# Altium PCB PCB.PcbDoc
Units mm, origin at the board's own origin, x right, y up, seen from the top; angles counter-clockwise.
Board outline 40.26 x 58.32 mm, 2 copper layers (Top Layer, Bottom Layer); 28 components, 24 nets, 130 pads, 39 vias.
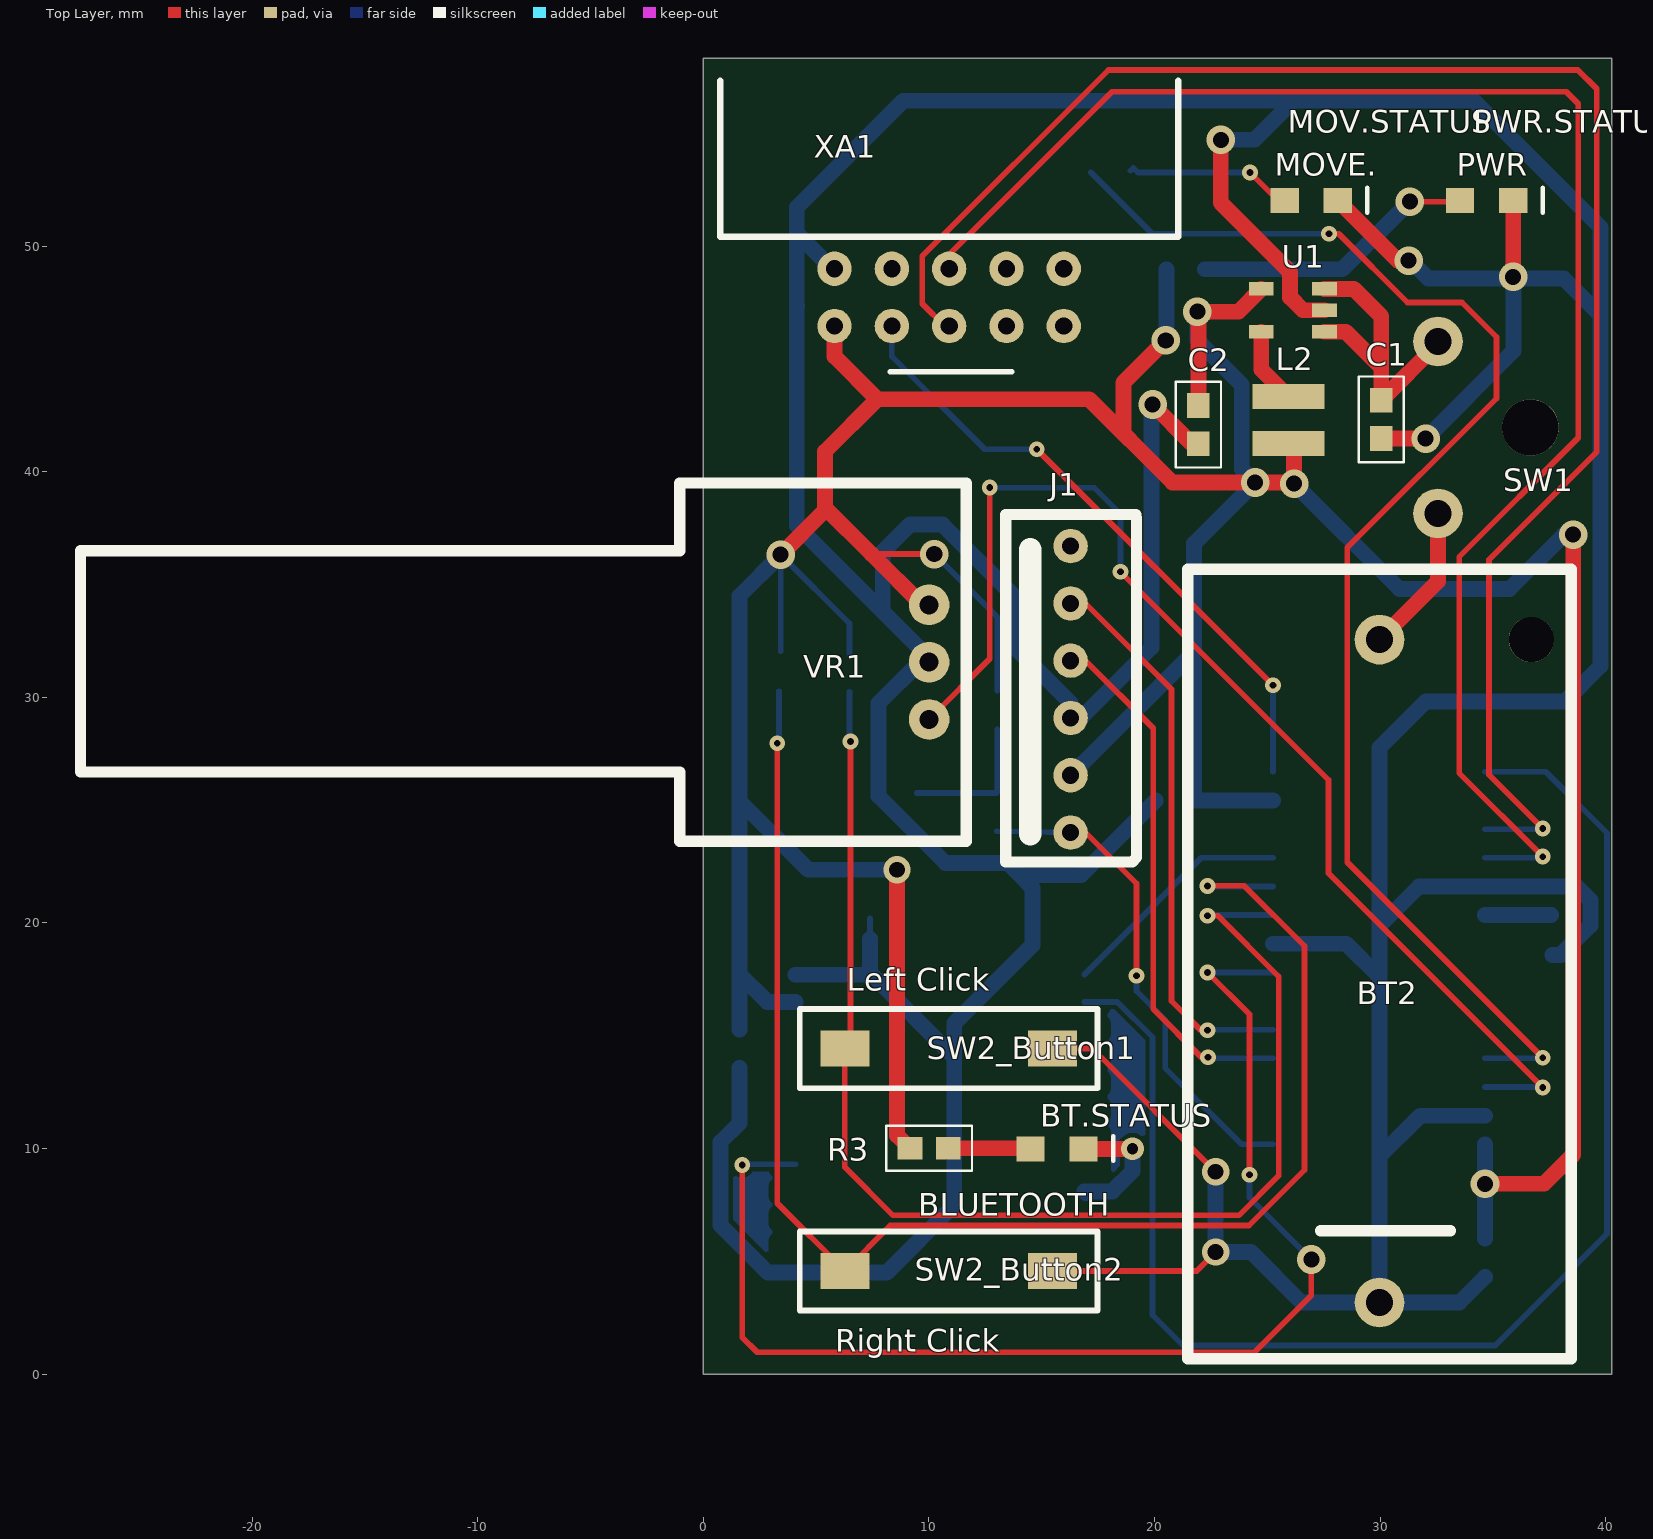
[diagram p0: Top Layer view]
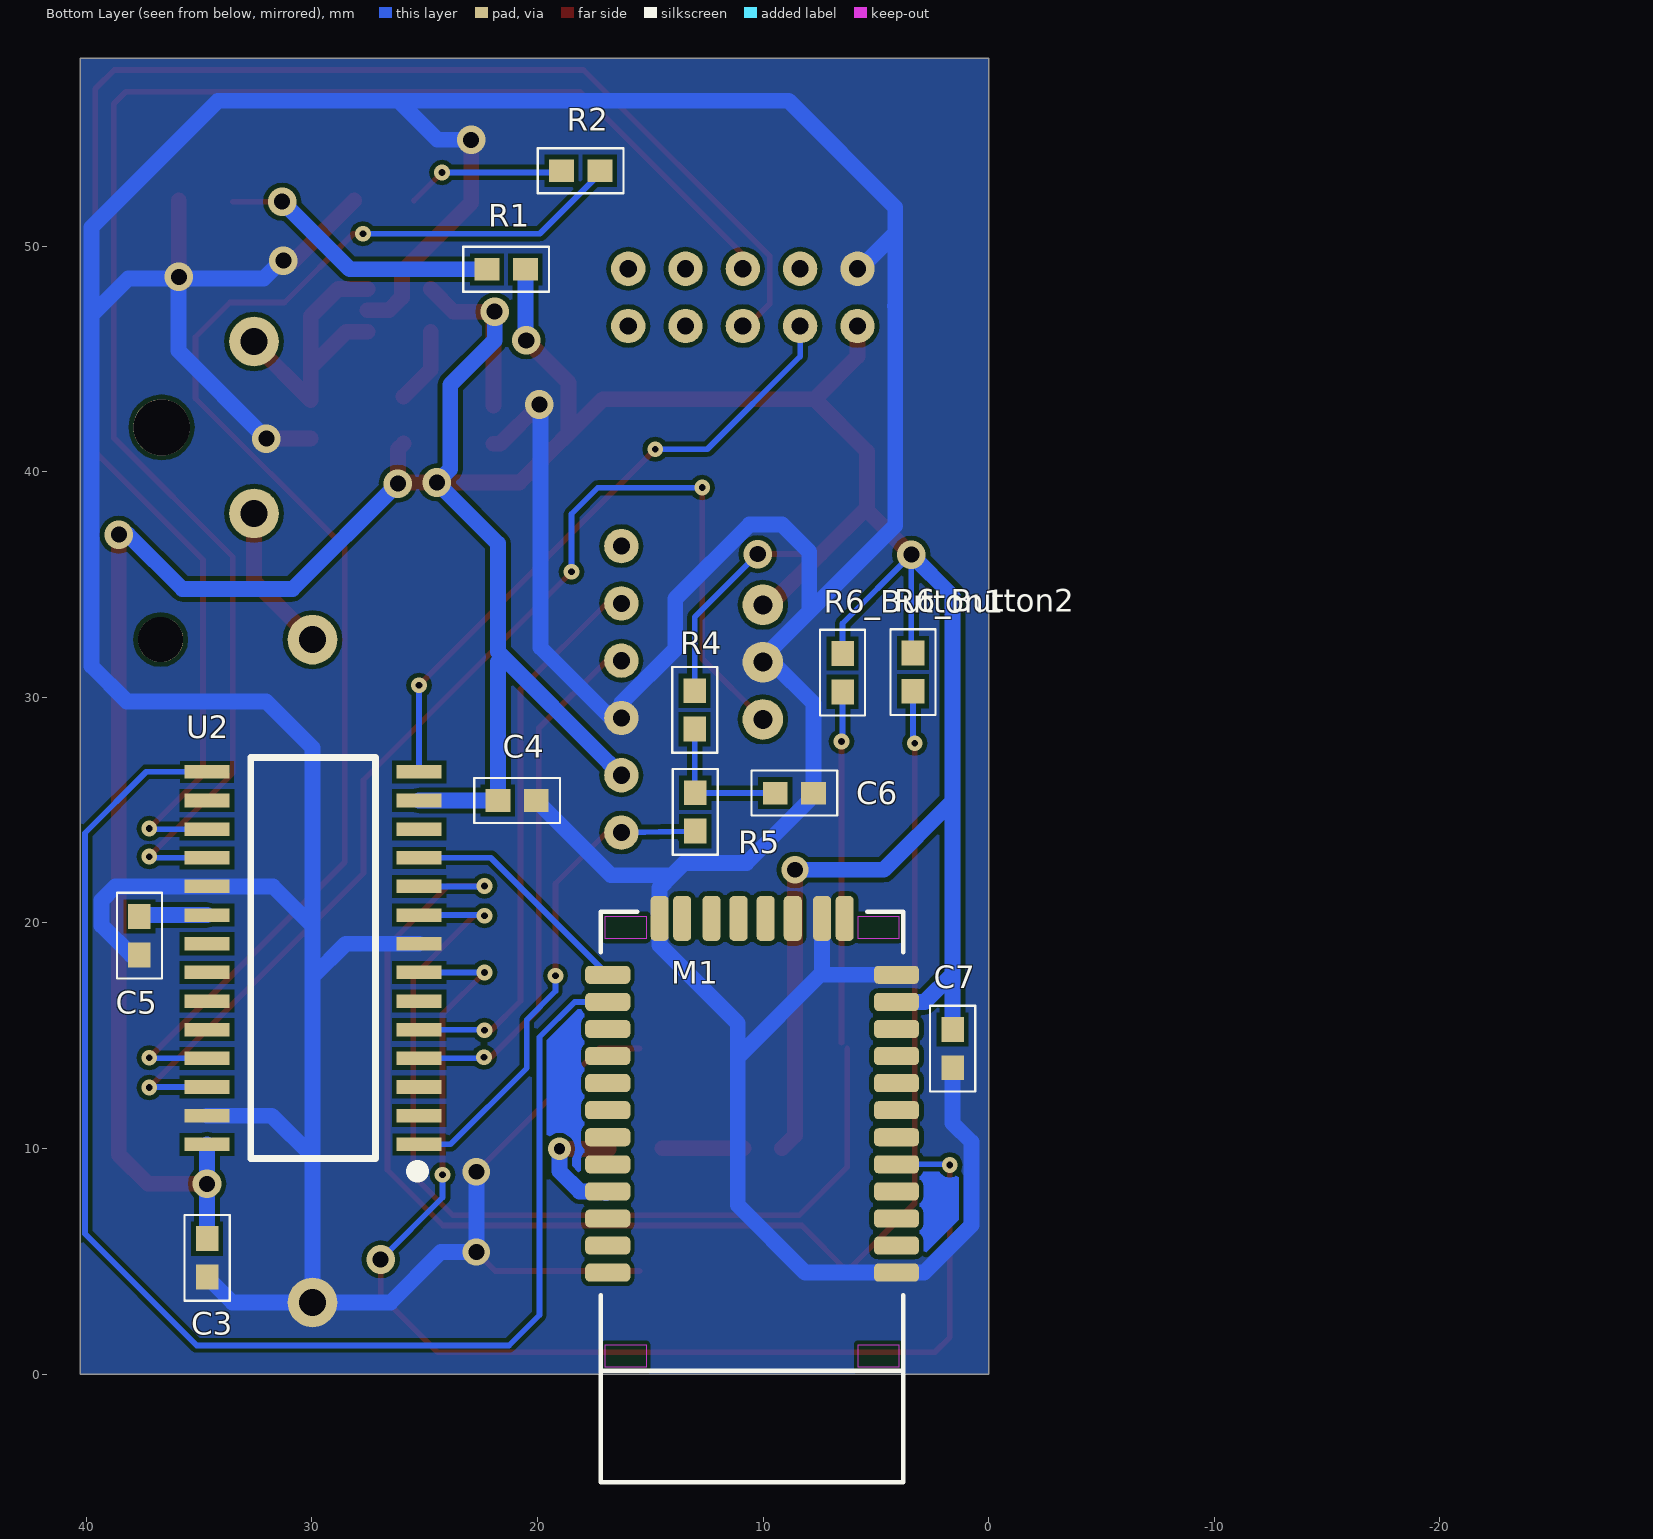
[diagram p1: Bottom Layer view, seen from below]

## Layer stack, top to bottom
Top Solder: solder mask 0.0102, Solder Resist, Dk 3.5
Top Layer: signal copper 0.0356
Dielectric 1: dielectric 0.32, FR-4, Dk 4.8
Bottom Layer: signal copper 0.0356
Bottom Solder: solder mask 0.0102, Solder Resist, Dk 3.5

## Board outline
0,0 40.259,0 40.259,58.318 0,58.318

## Design rules (kind name [scope] priority, off if disabled: settings)
Clearance [All] p1: gap=0.2
HoleSize [All] p1: absolutevalues=TRUE maxlimit=2.54 minlimit=0.3 maxpercent=80.000 minpercent=20.000
PolygonConnect [All] p1: connectstyle=Direct reliefconductorwidth=0.254 reliefentries=4 polygonreliefangle="90 Angle" airgapwidth=0.254
RoutingVias [All] p1: holewidth=0.711 width=1.27 viastyle="Through Hole" minholewidth=0.3 minwidth=0.7 maxholewidth=0.711 maxwidth=1.27
SilkToBoardRegionClearance [All] p1 off:
SolderMaskExpansion [All] p1: expansion=0.102
UnpouredPolygon [All] p1: allowunpoured=FALSE
Width [All] p1: maxlimit=1 minlimit=0.2 preferedwidth=0.254
27 further rules are at their usual default settings.

## Classes and differential pairs
channel class Button: Button1 Button2
component class PIC32MX: C3 C4 C5 C6 J1 MOV.STATUS R2 R4 R5 U2 VR1
component class Button2: R6_Button2 SW2_Button2
component class Button1: R6_Button1 SW2_Button1
component class Bluetooth: BT.STATUS C7 R3
component class Alim: C1 C2 L2 PWR.STATUS R1 SW1 U1
component class 9-axe: XA1

## Components (designator, comment, footprint, x,y, rotation, side; value= is the part's Value field where it differs from the comment)
BT2 "Battery" "Battery Holder" 29.973,3.175 r90 top
BT.STATUS "2mA, 1.8V" LED 15.672,9.982 r0 top (schematic designator D3)
C1 "4.7 uF" "CAP 0603" 30.048,42.316 r90 top
C2 "10 uF" "CAP 0603" 21.946,42.088 r90 top
C3 "0.1uF" "CAP 0603" 34.646,5.156 r90 bottom
C4 "0.1uF" "CAP 0603" 20.904,25.425 r0 bottom
C5 "10uF" "CAP 0603" 37.643,19.431 r90 bottom
C6 "0.1uF" "CAP 0603" 8.611,25.756 r0 bottom
C7 "Cap" "CAP 0603" 1.6,14.427 r90 bottom
J1 "Program / Debug" ICSP 16.281,24.003 r90 top
L2 "4.7uH" Coil 25.933,42.291 r270 top
M1 "RN42" RN42 3.785,20.498 r0 bottom
MOV.STATUS "2mA, 1.8V" LED 26.949,52.019 r0 top (schematic designator D2)
PWR.STATUS "2mA, 1.8V" LED 34.722,52.019 r0 top (schematic designator D1)
R1 "750" "RES 0603" 21.387,48.971 r180 bottom
R2 "750" "RES 0603" 18.085,53.34 r180 bottom
R3 "750" "RES 0603" 10.008,10.008 r180 top
R4 "10K" "RES 0603" 13.03,29.439 r90 bottom
R5 "1K" "RES 0603" 13.005,24.917 r90 bottom
R6_Button1 "10k" "RES 0603" 6.477,31.09 r90 bottom (schematic designator R6)
R6_Button2 "10k" "RES 0603" 3.353,31.115 r90 bottom (schematic designator R6)
SW1 "SW" "SWITCH ON/OFF" 32.563,38.151 r90 top
SW2_Button1 "SW-SPST" SWITCH 6.274,14.427 r0 top (schematic designator SW2)
SW2_Button2 "SW-SPST" SWITCH 6.274,4.572 r0 top (schematic designator SW2)
U1 "MCP1503B" MCP1603B/TSOT 27.534,46.203 r180 top
U2 "PIC32MX150F128B" PIC32MX150F128B 25.248,10.185 r0 bottom
VR1 "5k" 91A1A-B28-B13L 11.659,39.497 r180 top
XA1 "MOD-MPU9150 Breakout Board" MOD-MPU9150 11.278,51.841 r90 top

## Footprints (in the part's own frame and the unit in brackets; to place one, negate y for a bottom-side part, rotate by r counter-clockwise, add the part's x,y. Pads: shape width x height; smd on the part's side, far side on the other; paste and mask are expansions set on the pad)
91A1A-B28-B13L [mm] "Potard"
  round 1.8 hole 0.85: 1(1.65,5.4) 2(1.65,7.94) 3(1.65,10.48)
  silkscreen extent 0,0 39.27,15.88
"Battery Holder" [mm]
  round 2 hole 2 unplated: 0(29.38,-6.73)
  round 2.2 hole 1.2: 1(29.38,0) 2(0,0)
  silkscreen extent -2.5,-8.5 32.5,8.5
"CAP 0603" [mm]
  rect 1.1x1 smd: 1(-0.85,0) 2(0.85,0)
  silkscreen extent -1.9,-1 1.9,1
Coil [mm]
  rect 1.12x3.2 smd: 1(-1.04,0) 2(1.04,0)
ICSP [mil] "ICSP - 6 PINS"
  round 60 hole 30: 1(0.01,-0.02) 2(100.01,-0.02) 3(200.01,-0.02) 4(300.01,-0.02) 5(400.01,-0.02) 6(500.01,-0.02)
  silkscreen extent -51,-115 555,113
LED [mm]
  rect 1.25x1.1 smd: 1(-1.175,0) 2(1.175,0)
  silkscreen extent 2.49,-0.53 2.49,0.56
MCP1603B/TSOT [mm] "TSOT Package for MCP1603 and MCP1603B buck regulator"
  rect 1.1x0.6 smd: 1(0,0) 2(0,-0.95) 3(0,-1.9) 4(2.8,-1.9) 5(2.8,0)
MOD-MPU9150 [mil] "Header for the UEXT + 1"
  round 60 hole 30: 1(-212,215) 2(-112,215) 4(-112,115) 5(-212,15) 6(-112,15) 7(-212,-85) 8(-112,-85) 9(-212,-185) 10(-112,-185) 14(-212,115)
  silkscreen extent -292,-385 216,415
PIC32MX150F128B [mm] "SOIC Package"
  rect 2x0.6 smd: 1(0,0) 2(0,-1.27) 3(0,-2.54) 4(0,-3.81) 5(0,-5.08) 6(0,-6.35) 7(0,-7.62) 8(0,-8.89) 9(0,-10.16) 10(0,-11.43) 11(0,-12.7) 12(0,-13.97) 13(0,-15.24) 14(0,-16.51) 15(9.4,-16.51) 16(9.4,-15.24) 17(9.4,-13.97) 18(9.4,-12.7) 19(9.4,-11.43) 20(9.4,-10.16) 21(9.4,-8.89) 22(9.4,-7.62) 23(9.4,-6.35) 24(9.4,-5.08) 25(9.4,-3.81) 26(9.4,-2.54) 27(9.4,-1.27) 28(9.4,0)
  silkscreen extent 0.05,-17.14 7.46,1.19
"RES 0603" [mm]
  rect 1.1x1 smd: 1(-0.85,0) 2(0.85,0)
  silkscreen extent -1.9,-1 1.9,1
RN42 [mm] "RN42 Bluetooth Module with antenna"
  rrect50% 2x0.8 smd: 1(0.3,16) 2(0.3,14.8) 3(0.3,13.6) 4(0.3,12.4) 5(0.3,11.2) 6(0.3,10) 7(0.3,8.8) 8(0.3,7.6) 9(0.3,6.4) 10(0.3,5.2) 11(0.3,4) 12(0.3,2.8) 13(13.1,2.8) 14(13.1,4) 15(13.1,5.2) 16(13.1,6.4) 17(13.1,7.6) 18(13.1,8.8) 19(13.1,10) 20(13.1,11.2) 21(13.1,12.4) 22(13.1,13.6) 23(13.1,14.8) 24(13.1,16)
  rrect50% 0.8x2 smd mask+0.05: 28(10.8,0.3) 29(3.6,0.3) 30(9.8,0.3) 35(2.6,0.3)
  rrect50% 0.8x2 smd: 31(8.5,0.3) 32(7.3,0.3) 33(6.1,0.3) 34(4.9,0.3)
  Top Layer keep-out region: 0.2,1.2 2,1.2 2,0.2 0.2,0.2
  Top Layer keep-out region: 11.4,20.2 13.2,20.2 13.2,19.2 11.4,19.2
  Top Layer keep-out region: 0.2,20.2 2,20.2 2,19.2 0.2,19.2
  Top Layer keep-out region: 11.4,1.2 13.2,1.2 13.2,0.2 11.4,0.2
  silkscreen extent 0,0 13.4,25.3
SWITCH [mm]
  rect 2.18x1.6 smd: 1(0,0) 2(9.2,0)
  silkscreen extent -2,-1.75 11.2,1.75
"SWITCH ON/OFF" [mm]
  round 2.5 hole 2.5 unplated: 0(3.81,-4.1)
  round 2.2 hole 1.2: 1(0,0) 2(7.62,0)

## Part data
BT2: "Multicell Battery"
BT.STATUS MOV.STATUS PWR.STATUS: library part LED0, "Typical INFRARED GaAs LED"
C1 C2 C3 C4 C5 C6: library part Cap, "Capacitor"
C7: "Capacitor"
J1: library part MHDR1X6, "Header, 6-Pin"
L2: library part Inductor, "Inductor"
M1: "RN42 Bluetooth Module by Roven Networks"
R1 R2 R3 R4 R5 R6_Button1 R6_Button2: library part Res1, "Resistor"
SW1: library part SW-SPST, "Single-Pole, Single-Throw Switch"
SW2_Button1 SW2_Button2: "Single-Pole, Single-Throw Switch"
U1: library part MCP1603B, "Fixed 3.3Vout 0.5Aout regulator"
U2: library part PIC32MX130F256B, "PIC32MX Family Microcontroller"
VR1: library part RPot, "Potentiometer"
XA1: library part MPU9150, "MPU9150 Breakout Board, displaying 3 headers"

## Via types
v1: diameter 0.7, hole 0.3, Top Layer to Bottom Layer, 20 vias
v2: diameter 1.27, hole 0.711, Top Layer to Bottom Layer, 15 vias
v3: diameter 1.21, hole 0.7, Top Layer to Bottom Layer, 3 vias
v4: diameter 1, hole 0.5, Top Layer to Bottom Layer, 1 vias

## Nets (pads, with @x,y where several pads share a name; then routed paths per layer and width w, separated by ;. In a path a pad name is that pad's centre, name@x,y a point inside that pad or via, vN(x,y) a via of type N, cw(c..) or ccw(c..) an arc to the next point about the centre after c; other vN are vias at no path point)
"BOUTTON 1": R6_Button1.1 SW2_Button1.1 U2.9 | length 57.7
  Top Layer w0.254: SW2_Button1.1 6.274,9.169 8.407,7.036 23.749,7.036 25.502,8.788 25.502,17.628 22.809,20.32 v1(22.347,20.32) ; v1@6.426,28.042 v1(6.528,28.042) SW2_Button1.1@6.528,14.681
  Bottom Layer w0.254: v1@6.477,28.092 R6_Button1.1 ; v1@22.373,20.345 U2.9
"BOUTTON 2": R6_Button2.1 SW2_Button2.1 U2.10 | length 67.3
  Top Layer w0.254: v1(3.277,27.965) 3.277,7.569 SW2_Button2.1 8.284,6.582 24.184,6.582 26.645,9.042 26.645,18.974 23.978,21.641 v1(22.347,21.641)
  Bottom Layer w0.254: v1@3.353,28.042 R6_Button2.1 ; v1@22.373,21.615 U2.10
GND: BT2.2 C1.1 C2.1 C3.1 C4.1 C5.1 C6.1 C7.1 J1.3 M1.1 M1.12 M1.28 M1.29 MOV.STATUS.2 PWR.STATUS.2 SW2_Button1.2 SW2_Button2.2 U1.2 U2.8 U2.19 U2.27 VR1.2 XA1.2 | length 324.7
  Top Layer w0.254: SW2_Button2.2 21.869,4.572 v3(22.708,5.41) ; SW2_Button1.2 17.247,14.427 v3(22.708,8.966)
  Top Layer w0.7: v2(19.914,42.977) 21.653,41.238 C2.1 ; v2(22.936,54.712) 22.936,51.918 26.01,48.844 26.01,47.727 26.584,47.153 U1.2 ; MOV.STATUS.2 30.791,49.352 v2(31.267,49.352) ; C1.1 v2(32.018,41.466) ; v2(35.897,48.634) PWR.STATUS.2
  Bottom Layer w0.254: M1.29@7.385,19.285 M1.29 ; C6.1@7.761,25.628 C6.1
  Bottom Layer w0.7: C7.1 1.6,11.125 0.762,10.287 0.762,6.604 2.868,4.498 M1.1 8.13,4.498 11.125,7.493 11.125,14.046 ; M1.12 7.296,17.698 ; 4.166,47.346 4.14,47.346 ; XA1.2 5.715,48.997 4.14,50.571 ; M1.29@7.385,19.285 7.385,17.787 11.125,14.046 ; C6.1@7.761,25.628 10.732,22.657 13.487,22.657 14.036,22.108 ; C6.1 7.761,29.732 9.586,31.557 VR1.2 ; 7.95,33.884 7.95,36.449 9.155,37.654 10.605,37.654 13.894,34.366 13.894,32.132 16.282,29.744 J1.3 16.739,29.083 19.863,32.207 19.863,43.028 v2(19.914,42.977) ; VR1.2@10.105,31.653 4.14,37.617 4.14,47.346 ; C4.1 16.737,22.108 14.036,22.108 ; v3(22.708,8.966) v3(22.708,5.41) 24.282,5.41 26.518,3.175 BT2.2 ; v2(22.936,54.712) 24.435,54.712 26.162,56.439 ; U2.8 28.5,19.075 29.973,17.602 ; v2@31.293,49.403 32.131,48.565 v2@35.897,48.565 ; v2(32.018,41.466) 35.916,45.364 v2@35.916,48.565 ; C3.1 33.514,3.175 BT2.2 ; U2.27 31.777,11.455 29.973,9.652 ; v2(35.897,48.634) v2@35.941,48.59 ; v2@35.941,48.565 38.142,48.565 39.768,46.939 ; C5.1 38.012,18.581 39.319,19.888 39.319,21.006 38.71,21.615 U2.19 31.726,21.615 29.973,19.863 ; 4.14,47.346 4.14,50.571 ; 4.14,50.571 4.14,51.714 8.865,56.439 26.162,56.439 ; 11.125,14.046 11.125,15.545 14.585,19.004 M1.28 14.585,21.56 14.036,22.108 ; 26.162,56.439 34.163,56.439 39.768,50.834 39.768,46.939 ; BT2.2 29.973,9.652 ; 29.973,9.652 29.973,17.602 ; 29.973,17.602 29.973,19.863 ; 29.973,19.863 29.973,27.764 32.029,29.82 38.202,29.82 39.768,31.386 39.768,46.939
MCLR: J1.1 R5.1 U2.1 | length 22
  Top Layer w0.254: J1.1 16.942,24.003 19.202,21.743 v1(19.202,17.653)
  Bottom Layer w0.254: R5.1 J1.1 ; v1(19.202,17.653) 19.202,16.974 20.469,15.707 20.469,13.567 23.851,10.185 U2.1
NetBT2_1: BT2.1 SW1.1 | length 6.7
  Top Layer w0.7: BT2.1 32.563,35.144 SW1.1
NetC1_2: C1.2 SW1.2 U1.1 U1.3 | length 13.5
  Top Layer w0.7: U1.1 28.473,46.203 30.048,44.628 ; U1.3 28.834,48.103 30.048,46.888 30.048,44.628 ; SW1.2@32.563,45.681 C1.2 30.048,44.628
NetC5_2: C5.2 U2.20 | length 2.9
  Bottom Layer w0.7: U2.20 C5.2@37.578,20.345
NetC6_2: C6.2 R4.1 R5.2 | length 6.3
  Bottom Layer w0.254: C6.2 R5.2@12.993,25.756 ; R5.2@13.03,25.793 R4.1
NetD1_1: PWR.STATUS.1 R1.1 | length 12.5
  Top Layer w0.254: v2(31.318,51.968) PWR.STATUS.1@33.496,51.968
  Bottom Layer w0.7: R1.1 28.321,48.971 v2(31.318,51.968)
NetD2_1: MOV.STATUS.1 R2.1 | length 7.2
  Top Layer w0.254: v1(24.232,53.264) MOV.STATUS.1@25.476,52.019
  Bottom Layer w0.254: R2.1 19.062,53.467 19.265,53.264 v1(24.232,53.264)
NetD3_1: BT.STATUS.1 R3.1 | length 3.6
  Top Layer w0.7: R3.1 BT.STATUS.1@14.471,10.008
NetD3_2: BT.STATUS.2 M1.21 | length 5.8
  Top Layer w0.7: BT.STATUS.2 v4@19.021,9.982
  Bottom Layer w0.7: M1.21@16.956,8.026 M1.21 18.131,8.098 19.025,8.992 v4(19.025,9.986)
NetL2_1: L2.1 U1.5 | length 3.4
  Top Layer w0.7: U1.5 24.734,44.531 25.907,43.358 L2.1
NetM1_5: M1.5 U2.7 | length 55.6
  Top Layer w0.254: v1(1.727,9.271) 1.727,1.626 2.388,0.965 24.435,0.965 26.949,3.48 v2(26.949,5.08) ; v1(22.347,17.805) 24.206,15.946 v1(24.206,8.839)
  Bottom Layer w0.254: v1@1.754,9.298 M1.5 ; v1(22.347,17.805) U2.7 ; v1(24.206,8.839) 24.206,7.823 v2(26.949,5.08)
NetM1_13: M1.13 U2.11 | length 10.5
  Bottom Layer w0.254: M1.13 22.072,22.885 U2.11
NetM1_14: M1.14 U2.15 | length 63
  Bottom Layer w0.254: M1.14 18.351,16.498 19.914,14.935 19.914,2.616 21.26,1.27 35.103,1.27 40.056,6.223 40.056,23.978 37.338,26.695 U2.15
NetR2_2: R2.2 U2.25 | length 61.8
  Top Layer w0.254: v1(27.737,50.546) 28.169,50.546 31.217,47.498 33.63,47.498 35.154,45.974 35.154,43.242 28.546,36.635 28.546,22.685 v1(37.211,14.021)
  Bottom Layer w0.254: R2.2@17.17,53.276 19.9,50.546 v1(27.737,50.546) ; U2.25 v1@37.186,13.995
NetU2_14: U2.14 XA1.14 | length 28.1
  Top Layer w0.254: v1(14.783,40.996) v1(25.248,30.531)
  Bottom Layer w0.254: XA1.14 8.357,45.11 12.471,40.996 v1(14.783,40.996) ; U2.14 v1(25.248,30.531)
NetU2_17: U2.17 XA1.5 | length 75.7
  Top Layer w0.254: XA1.5 10.693,46.457 9.703,47.447 9.703,49.555 17.958,57.81 38.76,57.81 39.599,56.972 39.599,40.869 34.823,36.093 34.823,26.568 v1(37.211,24.181)
  Bottom Layer w0.254: U2.17 v1@37.186,24.155
NetU2_18: U2.18 XA1.6 | length 71.3
  Top Layer w0.254: XA1.6 10.897,49.632 18.11,56.845 38.252,56.845 38.786,56.312 38.786,41.504 33.503,36.22 33.503,26.645 v1(37.211,22.936)
  Bottom Layer w0.254: U2.18 v1@37.16,22.885
NetU2_26: U2.26 VR1.3 | length 53.4
  Top Layer w0.254: VR1.3 12.7,31.708 v1(12.7,39.294) ; v1(18.491,35.56) 27.711,26.34 27.711,22.2 v1(37.211,12.7)
  Bottom Layer w0.254: v1(12.7,39.294) 17.323,39.294 18.491,38.125 v1(18.491,35.56) ; U2.26 v1@37.186,12.725
PGEC: J1.5 U2.5 | length 24.9
  Top Layer w0.254: J1.5 16.942,34.163 20.752,30.354 20.752,16.535 22.047,15.24 v1(22.347,15.24)
  Bottom Layer w0.254: v1@22.373,15.265 U2.5
PGED: J1.4 U2.4 | length 23.5
  Top Layer w0.254: J1.4 16.942,31.623 19.939,28.626 19.939,16.18 22.073,14.046 v1(22.373,14.046)
  Bottom Layer w0.254: v1@22.423,13.995 U2.4
V3P3: C2.2 C3.2 C4.2 C7.2 J1.2 L2.2 M1.11 R1.2 R3.2 R4.2 R6_Button1.2 R6_Button2.2 U1.4 U2.13 U2.28 VR1.1 XA1.1 | length 206.8
  Top Layer w0.254: 7.453,36.347 v2(10.236,36.347)
  Top Layer w0.7: v2(3.429,36.322) 5.393,38.286 ; XA1.1 5.817,45.11 7.713,43.214 ; v3(8.585,22.352) 8.585,10.58 R3.2 ; VR1.1@9.704,34.097 7.453,36.347 5.393,38.408 5.393,40.894 7.713,43.214 ; 18.618,41.7 18.618,43.942 v2(20.498,45.822) ; C2.2 21.946,47.041 v2(21.895,47.092) 23.723,47.092 U1.4 ; L2.2 26.187,40.997 v2(26.187,39.472) ; v2@26.137,39.522 v2(24.46,39.522) 20.796,39.522 17.104,43.214 7.713,43.214 ; v2(34.646,8.433) 37.262,8.433 38.557,9.728 v2(38.557,37.211)
  Bottom Layer w0.254: R6_Button2.2@3.429,32.041 v2(3.429,36.322) 6.477,33.274 R6_Button1.2 ; v2(10.236,36.347) 13.03,33.553 R4.2
  Bottom Layer w0.7: C7.2 1.6,17.729 ; v2(3.429,36.322) 1.6,34.493 1.6,25.4 ; M1.11 2.832,16.498 1.6,17.729 ; v3(8.585,22.352) 4.648,22.352 1.6,25.4 ; 16.828,27.089 21.754,32.016 21.754,36.816 v2(24.46,39.522) 23.867,40.115 23.867,43.849 21.895,45.821 v2(21.895,47.092) ; v2@20.537,45.861 R1.2 ; 21.754,31.558 C4.2 U2.13 ; v2(26.187,39.472) 30.861,34.798 35.738,34.798 38.151,37.211 v2(38.557,37.211) ; C3.2 v2(34.646,8.433) U2.28@34.646,10.183 ; 1.6,17.729 1.6,25.4
pads on no net: BT2.0 J1.6 M1.2 M1.3 M1.4 M1.6 M1.7 M1.8 M1.9 M1.10 M1.15 M1.16 M1.17 M1.18 M1.19 M1.20 M1.22 M1.23 M1.24 M1.30 M1.31 M1.32 M1.33 M1.34 M1.35 SW1.0 U2.2 U2.3 U2.6 U2.12 U2.16 U2.21 U2.22 U2.23 U2.24 XA1.4 XA1.7 XA1.8 XA1.9 XA1.10

## Polygon pours and split planes (outlines as drawn)
GND on Bottom Layer "GND PLAN" (solid, pour order 4): 0,58.318 40.259,58.318 40.259,0 0,0 0,58.318

## Other copper
Bottom Layer:
  region: 2.908,8.942 2.996,8.809 3.049,8.774 3.049,8.621 2.996,8.586 2.908,8.454 2.877,8.298 2.877,7.898 2.908,7.742 2.996,7.609 3.049,7.574 3.049,7.421 2.996,7.386 2.908,7.254 2.877,7.098 2.877,6.698 2.908,6.542 2.996,6.409 3.049,6.374 3.049,6.221 2.996,6.186 2.908,6.054 2.877,5.898 2.877,5.498 2.886,5.453 2.769,5.39 1.323,6.836 1.323,8.727 1.45,8.795 1.513,8.753 1.727,8.71 1.942,8.753 2.124,8.874 2.184,8.964 2.903,8.964
  region: 19.58,14.797 19.58,10.602 19.453,10.539 19.378,10.597 19.207,10.668 19.025,10.692 18.842,10.668 18.672,10.597 18.525,10.485 18.413,10.339 18.343,10.169 18.319,9.986 18.343,9.803 18.413,9.633 18.464,9.567 18.464,9.224 18.193,8.953 18.076,9.016 18.092,9.098 18.092,9.498 18.061,9.654 17.973,9.786 17.92,9.821 17.92,9.974 17.973,10.009 18.061,10.142 18.092,10.298 18.092,10.698 18.061,10.854 17.973,10.986 17.92,11.021 17.92,11.174 17.973,11.209 18.061,11.342 18.092,11.498 18.092,11.898 18.061,12.054 17.973,12.186 17.92,12.221 17.92,12.374 17.973,12.409 18.061,12.542 18.092,12.698 18.092,13.098 18.061,13.254 17.973,13.386 17.92,13.421 17.92,13.574 17.973,13.609 18.061,13.742 18.092,13.898 18.092,14.298 18.061,14.454 17.973,14.586 17.92,14.621 17.92,14.774 17.973,14.809 18.061,14.942 18.092,15.098 18.092,15.498 18.061,15.654 17.973,15.786 17.92,15.821 17.92,15.974 17.973,16.009 18.061,16.142 18.066,16.164 18.213,16.164
  region: 19.58,14.797 19.58,10.602 19.453,10.539 19.378,10.597 19.207,10.668 19.025,10.692 18.842,10.668 18.672,10.597 18.525,10.485 18.413,10.339 18.343,10.169 18.319,9.986 18.343,9.803 18.413,9.633 18.464,9.567 18.464,9.224 18.193,8.953 18.076,9.016 18.092,9.098 18.092,9.498 18.061,9.654 17.973,9.786 17.92,9.821 17.92,9.974 17.973,10.009 18.061,10.142 18.092,10.298 18.092,10.698 18.061,10.854 17.973,10.986 17.92,11.021 17.92,11.174 17.973,11.209 18.061,11.342 18.092,11.498 18.092,11.898 18.061,12.054 17.973,12.186 17.92,12.221 17.92,12.374 17.973,12.409 18.061,12.542 18.092,12.698 18.092,13.098 18.061,13.254 17.973,13.386 17.92,13.421 17.92,13.574 17.973,13.609 18.061,13.742 18.092,13.898 18.092,14.298 18.061,14.454 17.973,14.586 17.92,14.621 17.92,14.774 17.973,14.809 18.061,14.942 18.092,15.098 18.092,15.498 18.061,15.654 17.973,15.786 17.92,15.821 17.92,15.974 17.973,16.009 18.061,16.142 18.066,16.164 18.213,16.164
  region: 19.58,14.797 19.58,10.602 19.453,10.539 19.378,10.597 19.207,10.668 19.025,10.692 18.842,10.668 18.672,10.597 18.525,10.485 18.413,10.339 18.343,10.169 18.319,9.986 18.343,9.803 18.413,9.633 18.464,9.567 18.464,9.224 18.193,8.953 18.076,9.016 18.092,9.098 18.092,9.498 18.061,9.654 17.973,9.786 17.92,9.821 17.92,9.974 17.973,10.009 18.061,10.142 18.092,10.298 18.092,10.698 18.061,10.854 17.973,10.986 17.92,11.021 17.92,11.174 17.973,11.209 18.061,11.342 18.092,11.498 18.092,11.898 18.061,12.054 17.973,12.186 17.92,12.221 17.92,12.374 17.973,12.409 18.061,12.542 18.092,12.698 18.092,13.098 18.061,13.254 17.973,13.386 17.92,13.421 17.92,13.574 17.973,13.609 18.061,13.742 18.092,13.898 18.092,14.298 18.061,14.454 17.973,14.586 17.92,14.621 17.92,14.774 17.973,14.809 18.061,14.942 18.092,15.098 18.092,15.498 18.061,15.654 17.973,15.786 17.92,15.821 17.92,15.974 17.973,16.009 18.061,16.142 18.066,16.164 18.213,16.164

## Silkscreen, mask and mechanical layers (free items; w line width, h text height)
Top Overlay:
  text "MOVE." at 25.324,53.111 h1
  text "PWR" at 33.401,53.111 h1
  text "Left Click" at 6.35,16.993 h1
  text "BLUETOOTH" at 9.525,7.01 h1
  text "Right Click" at 5.85,0.991 h1
Drill Drawing:
  circle w0.025: c45.087,25.289 r0.536
  lines w0.025: 44.551,21.805 44.819,21.805 44.819,21.537 45.355,21.537 45.355,21.805 45.623,21.805 45.623,22.341 45.355,22.341 45.355,22.609 44.819,22.609 44.819,22.341 44.551,22.341 44.551,21.805 ; 44.551,27.969 45.623,27.969 45.623,29.041 44.551,29.041 44.551,27.969 ; 44.551,31.453 44.819,31.453 45.087,31.185 45.355,31.453 45.623,31.453 45.355,31.721 45.623,31.989 45.355,31.989 45.087,32.257 44.819,31.989 44.551,31.989 44.819,31.721 44.551,31.453 ; 44.551,35.472 45.623,35.472 45.087,34.401 44.551,35.472 ; 44.551,37.616 45.087,37.884 45.623,37.616 45.355,38.152 45.623,38.688 45.087,38.42 44.551,38.688 44.819,38.152 44.551,37.616 ; 44.551,40.832 45.623,40.832 45.623,41.904 44.551,41.904 44.551,40.832 ; 44.551,44.584 45.087,44.048 45.623,44.584 45.087,45.12 44.551,44.584 ; 44.551,47.264 44.551,47.532 44.819,47.8 44.551,48.068 44.551,48.336 44.819,48.336 45.087,48.068 45.355,48.336 45.623,48.336 45.623,48.068 45.355,47.8 45.623,47.532 45.623,47.264 45.355,47.264 45.087,47.532 44.819,47.264 44.551,47.264 ; 44.766,41.047 45.409,41.047 45.409,41.69 44.766,41.69 44.766,41.047
  lines w0.381: 43.078,20.573 126.873,20.573 ; 43.078,49.515 126.873,49.515 ; 55.015,17.357 55.015,52.731 ; 70.102,17.357 70.102,52.731 ; 99.077,17.357 99.077,52.731 ; 110.049,17.357 110.049,52.731 ; 43.078,17.357 126.873,17.357 126.873,52.731 43.078,52.731 43.078,17.357
  text "Symbol" at 45.008,50.48 h1.54
  text "Hit Count" at 55.98,50.48 h1.54
  text "Finished Hole Size" at 71.067,50.48 h1.54
  text "Plated" at 100.042,50.48 h1.54
  text "Hole Type" at 111.014,50.48 h1.54
  text "1" at 55.98,47.264 h1.29
  text "0.500mm (19.69mil)" at 71.067,47.264 h1.29
  text "PTH" at 100.042,47.264 h1.29
  text "Round" at 111.014,47.264 h1.29
  text "1" at 55.98,44.048 h1.29
  text "2.000mm (78.74mil)" at 71.067,44.048 h1.29
  text "NPTH" at 100.042,44.048 h1.29
  text "Round" at 111.014,44.048 h1.29
  text "1" at 55.98,40.832 h1.29
  text "2.500mm (98.43mil)" at 71.067,40.832 h1.29
  text "NPTH" at 100.042,40.832 h1.29
  text "Round" at 111.014,40.832 h1.29
  text "3" at 55.98,37.616 h1.29
  text "0.700mm (27.56mil)" at 71.067,37.616 h1.29
  text "PTH" at 100.042,37.616 h1.29
  text "Round" at 111.014,37.616 h1.29
  text "3" at 55.98,34.401 h1.29
  text "0.850mm (33.46mil)" at 71.067,34.401 h1.29
  text "PTH" at 100.042,34.401 h1.29
  text "Round" at 111.014,34.401 h1.29
  text "4" at 55.98,31.185 h1.29
  text "1.200mm (47.24mil)" at 71.067,31.185 h1.29
  text "PTH" at 100.042,31.185 h1.29
  text "Round" at 111.014,31.185 h1.29
  text "15" at 55.98,27.969 h1.29
  text "0.711mm (28.00mil)" at 71.067,27.969 h1.29
  text "PTH" at 100.042,27.969 h1.29
  text "Round" at 111.014,27.969 h1.29
  text "16" at 55.98,24.753 h1.29
  text "0.762mm (30.00mil)" at 71.067,24.753 h1.29
  text "PTH" at 100.042,24.753 h1.29
  text "Round" at 111.014,24.753 h1.29
  text "20" at 55.98,21.537 h1.29
  text "0.300mm (11.81mil)" at 71.067,21.537 h1.29
  text "PTH" at 100.042,21.537 h1.29
  text "Round" at 111.014,21.537 h1.29
  text "64 Total" at 55.98,18.321 h1.29
Board Outline:
  lines w0.254: 40.259,58.318 0,58.318 0,0 40.259,0 40.259,58.318 ; 40.259,58.318 40.259,58.318

## Dimensions
0,58.318 to 40.259,58.318 on Mechanical 16
0,58.318 to 0,0 on Mechanical 16